# EAGLE board SparkFun_FT245-Breakout (EAGLE 6.6.0)
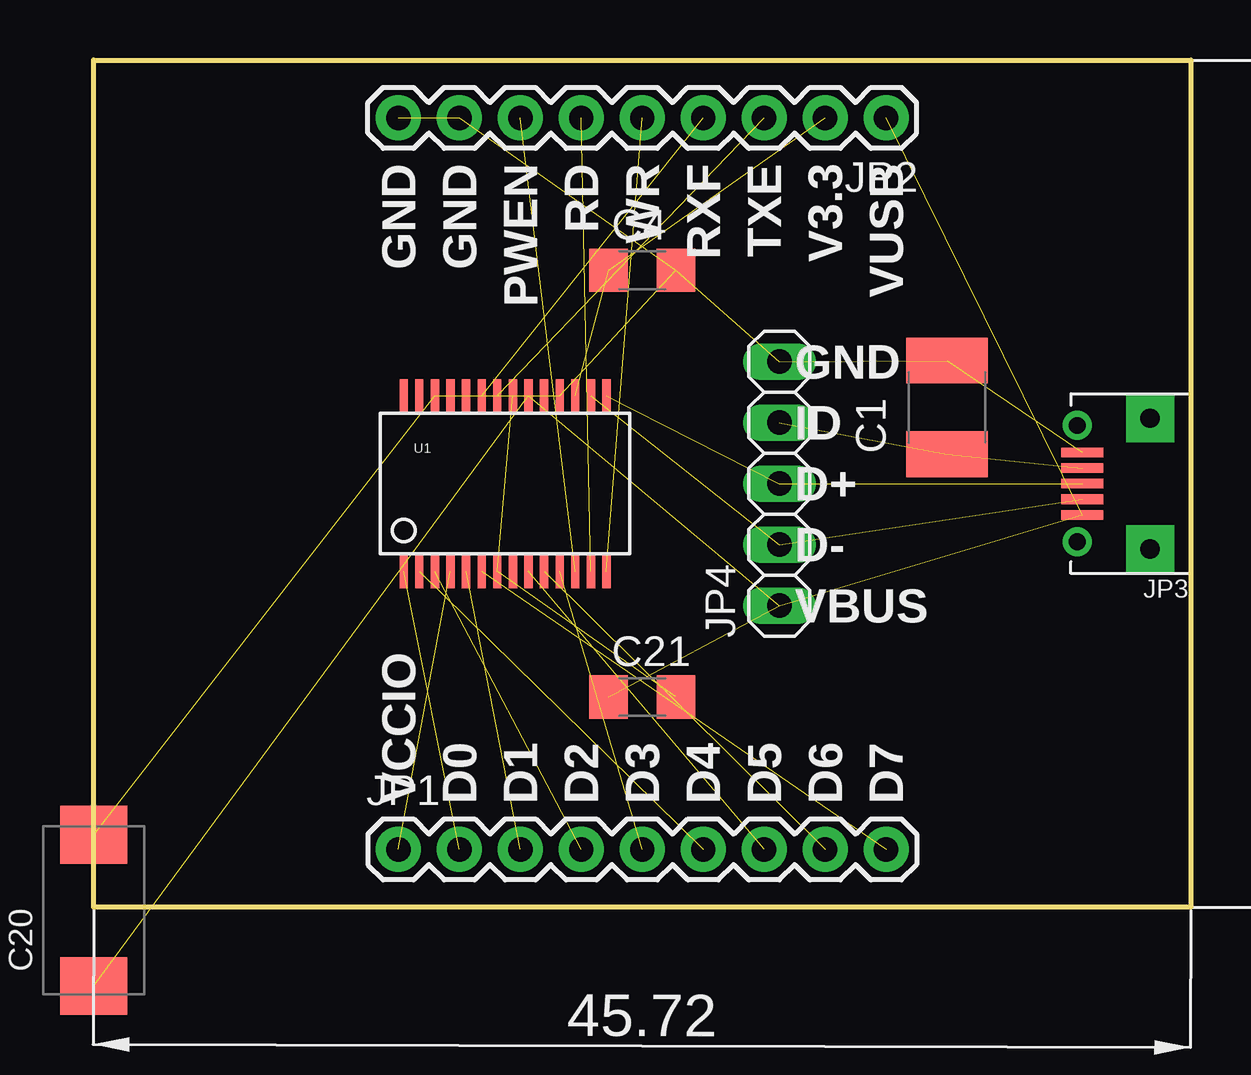
[diagram p0: board, top side]
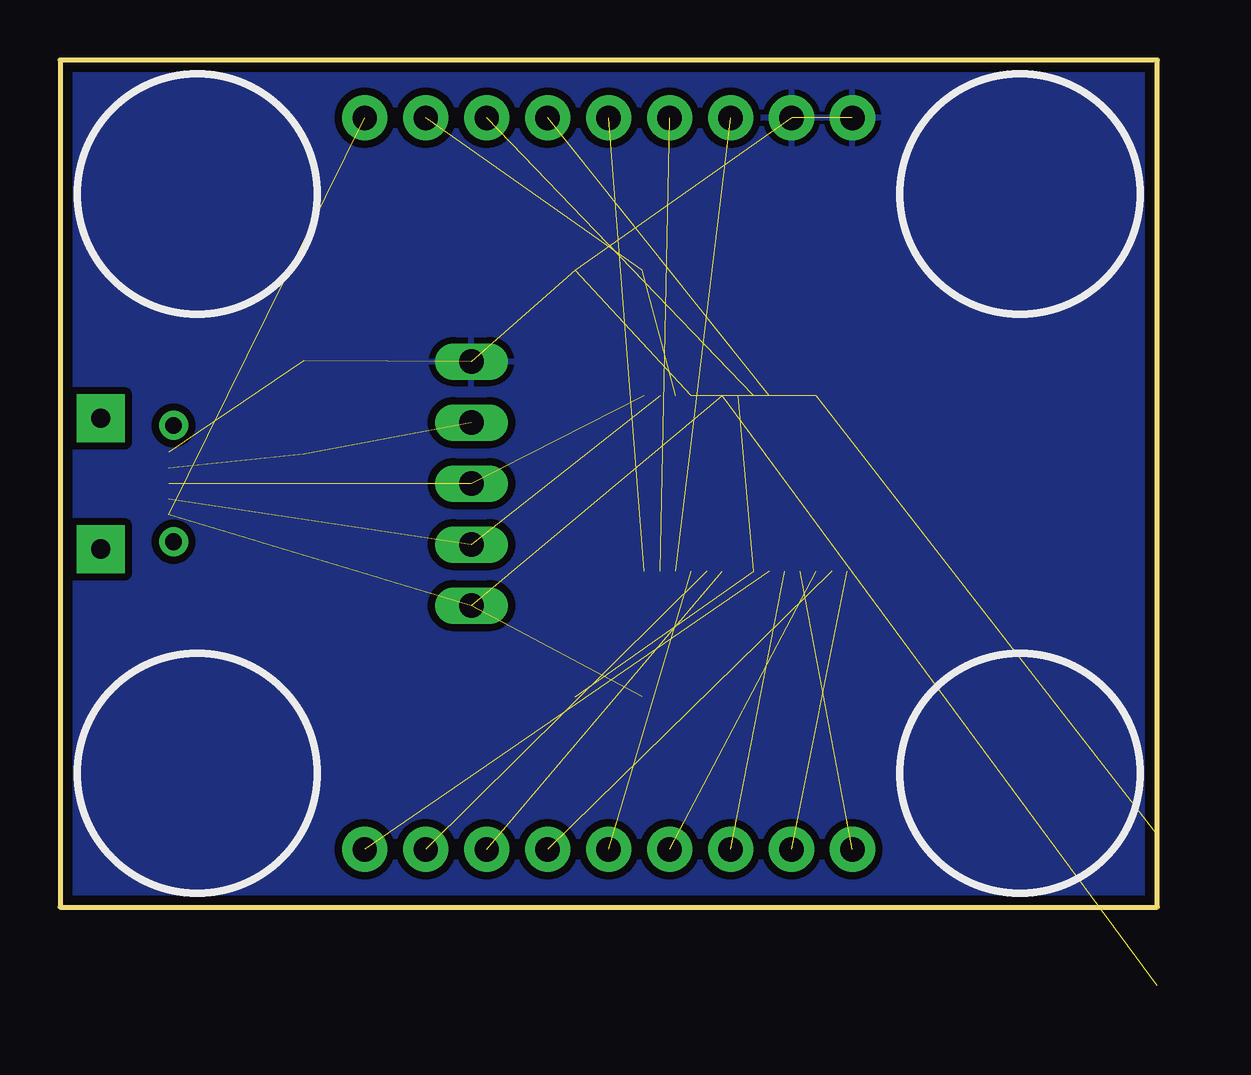
[diagram p1: board, bottom side, seen from below]

Size 45.72 x 35.3 mm. Coordinates in mm from the lower left corner, seen from the top.
Outline: 0,35.3 45.72,35.3 45.72,0 0,0 0,35.3
Copper layers (1*16): Top 0.035mm / dielectric 1.5mm / Bottom 0.035mm
Design rules "NOA Eagle Rule 2016-06-12": minimum track width 6mil, minimum drill 0.3mm, track to track 6mil, track to pad 6mil, pad to pad 6mil, via to via 6mil, smd to smd 0mil, copper to edge 0.4mm, drill to drill 10mil, minimum pad ring 10mil, minimum via ring 6mil, stop-mask expansion 2mil, vias tented up to drill 25mil, thermal gap 10mil
Net classes: 0 default: width 0.203 mm; 1 duenn: width 0.254 mm

## Footprints (pad centres in the part's own frame; a part is rotated, then mirrored left to right if it is on the bottom)
C1812 = smd 1.9 x 3.4: 1 -1.95,0; 2 1.95,0
C1206 = smd 1.6 x 1.8: 1 -1.4,0; 2 1.4,0
SMC_E = smd 2.4 x 2.8: + -3.15,0; - 3.15,0
1X09 = drill 1.016 pad 1.88: 1 0,0; 2 2.54,0; 3 5.08,0; 4 7.62,0; 5 10.16,0; 6 12.7,0; 7 15.24,0; 8 17.78,0; 9 20.32,0
FCI-10103594-0001LF = smd 0.4 x 1.75: 1 -1.3,4.525; 2 -0.65,4.525; 3 0,4.525; 4 0.65,4.525; 5 1.3,4.525 | drill 0.7: P$1 -2.425,4.73; P$2 2.425,4.73 | drill 0.8 pad 2 square: P$3 -2.725,1.7; P$4 2.725,1.7
1X05 = drill 1.016 long: 1 -5.08,0; 2 -2.54,0; 3 0,0; 4 2.54,0; 5 5.08,0
SSOP28DB = smd 0.348 x 1.397: 1 -4.225,-3.656; 2 -3.575,-3.656; 3 -2.925,-3.656; 4 -2.275,-3.656; 5 -1.625,-3.656; 6 -0.975,-3.656; 7 -0.325,-3.656; 8 0.325,-3.656; 9 0.975,-3.656; 10 1.625,-3.656; 11 2.275,-3.656; 12 2.925,-3.656; 13 3.575,-3.656; 14 4.225,-3.656; 15 4.225,3.656; 16 3.575,3.656; 17 2.925,3.656; 18 2.275,3.656; 19 1.625,3.656; 20 0.975,3.656; 21 0.325,3.656; 22 -0.325,3.656; 23 -0.975,3.656; 24 -1.625,3.656; 25 -2.275,3.656; 26 -2.925,3.656; 27 -3.575,3.656; 28 -4.225,3.656

## Placement (x,y rotation side)
C1  470n  [C1812]  35.56,20.82 90 top
C4  100n  [C1206]  22.86,26.54 0 top
C20  10u  [SMC_E]  0,-0.13 90 top
C21  100n  [C1206]  22.86,8.76 0 top
JP1  M09  [1X09]  12.7,2.41 0 top
JP2  M09  [1X09]  33.02,32.89 180 top
JP3  USB-RECEPTABLE  [FCI-10103594-0001LF]  45.72,17.65 90 top
JP4  [1X05]  28.57,17.65 90 top
U1  FT245RL  [SSOP28DB]  17.14,17.65 0 top

## Library data of the parts
C1 C4 C21 = rcl
C20 = myLib
JP1 JP2 U1 = SparkFun
JP3 = daspilker
JP4 = pinhead

## Nets
3.3V: C4.1 JP2.2 U1.17
D0: JP1.2 U1.1
D1: JP1.3 U1.5
D2: JP1.4 U1.3
D3: JP1.5 U1.11
D4: JP1.6 U1.2
D5: JP1.7 U1.9
D6: JP1.8 U1.10
D7: JP1.9 U1.6
D+: JP3.3 JP4.3 U1.15
D-: JP3.2 JP4.2 U1.16
GND: C1.2 C4.2 C20.- C21.2 JP2.8 JP2.9 JP3.5 JP4.5 U1.7 U1.18 U1.21 U1.25 U1.26
ID [duenn]: C1.1 JP3.4 JP4.4
PWEN: JP2.7 U1.12
RD: JP2.6 U1.13
RXF: JP2.4 U1.23
TXE: JP2.3 U1.22
VCCIO: JP1.1 U1.4
VUSB: C20.+ C21.1 JP2.1 JP3.1 JP4.1 U1.20
WR: JP2.5 U1.14

## Tracks (layer width: path | path; a pad name or v marks a point on that pad's centre or on a via)
3.3V  (2 unrouted)
D0  (1 unrouted)
D1  (1 unrouted)
D2  (1 unrouted)
D3  (1 unrouted)
D4  (1 unrouted)
D5  (1 unrouted)
D6  (1 unrouted)
D7  (1 unrouted)
D+  (2 unrouted)
D-  (2 unrouted)
GND  (12 unrouted)
  pour Bottom (isolate 0.305): 0.64,0.51 0.64,34.79 45.09,34.79 45.09,0.51
ID  (2 unrouted)
PWEN  (1 unrouted)
RD  (1 unrouted)
RXF  (1 unrouted)
TXE  (1 unrouted)
VCCIO  (1 unrouted)
VUSB  (5 unrouted)
WR  (1 unrouted)

## Text on the board
tPlace: GND | GND | PWEN | RD | WR | RXF | TXE | V3.3 | VUSB | GND | ID | D+ | D- | VBUS | VCCIO | D0 | D1 | D2 | D3 | D4 | D5 | D6 | D7